# Altium PCB PCB.PcbDoc
Units mm, origin at the board's own origin, x right, y up, seen from the top; angles counter-clockwise.
Board outline 105 x 135 mm, 3 copper layers (Top Layer, Mid-Layer 9, Bottom Layer); 197 components, 98 nets, 576 pads, 14 vias.
Unrouted connection lines stored in the file: 420.
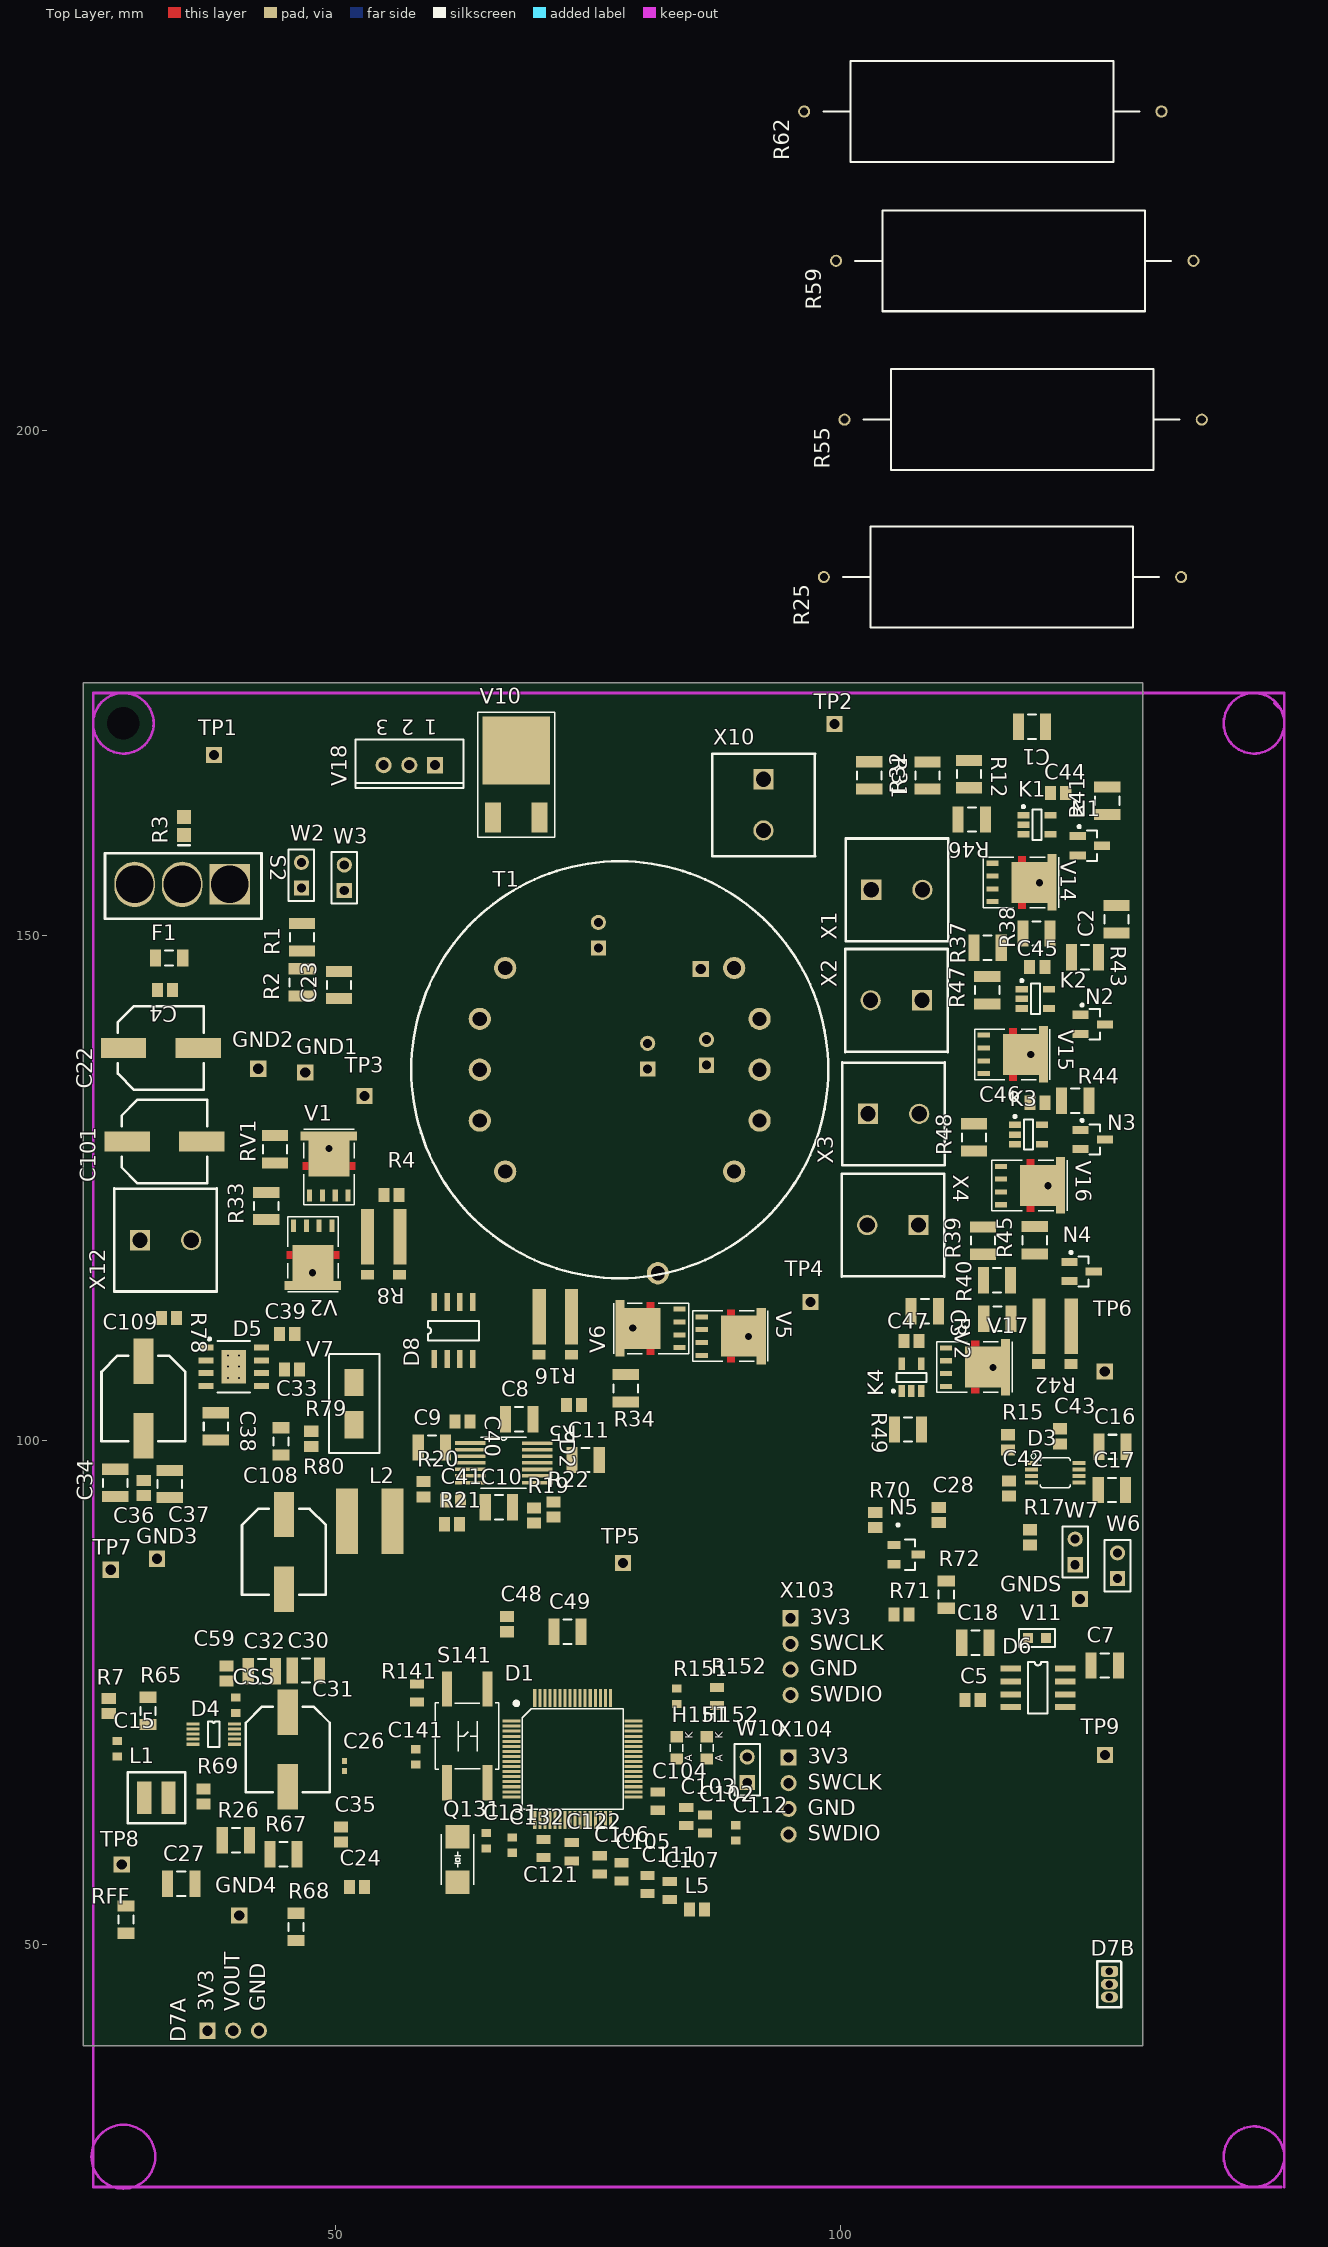
[diagram p0: Top Layer view]
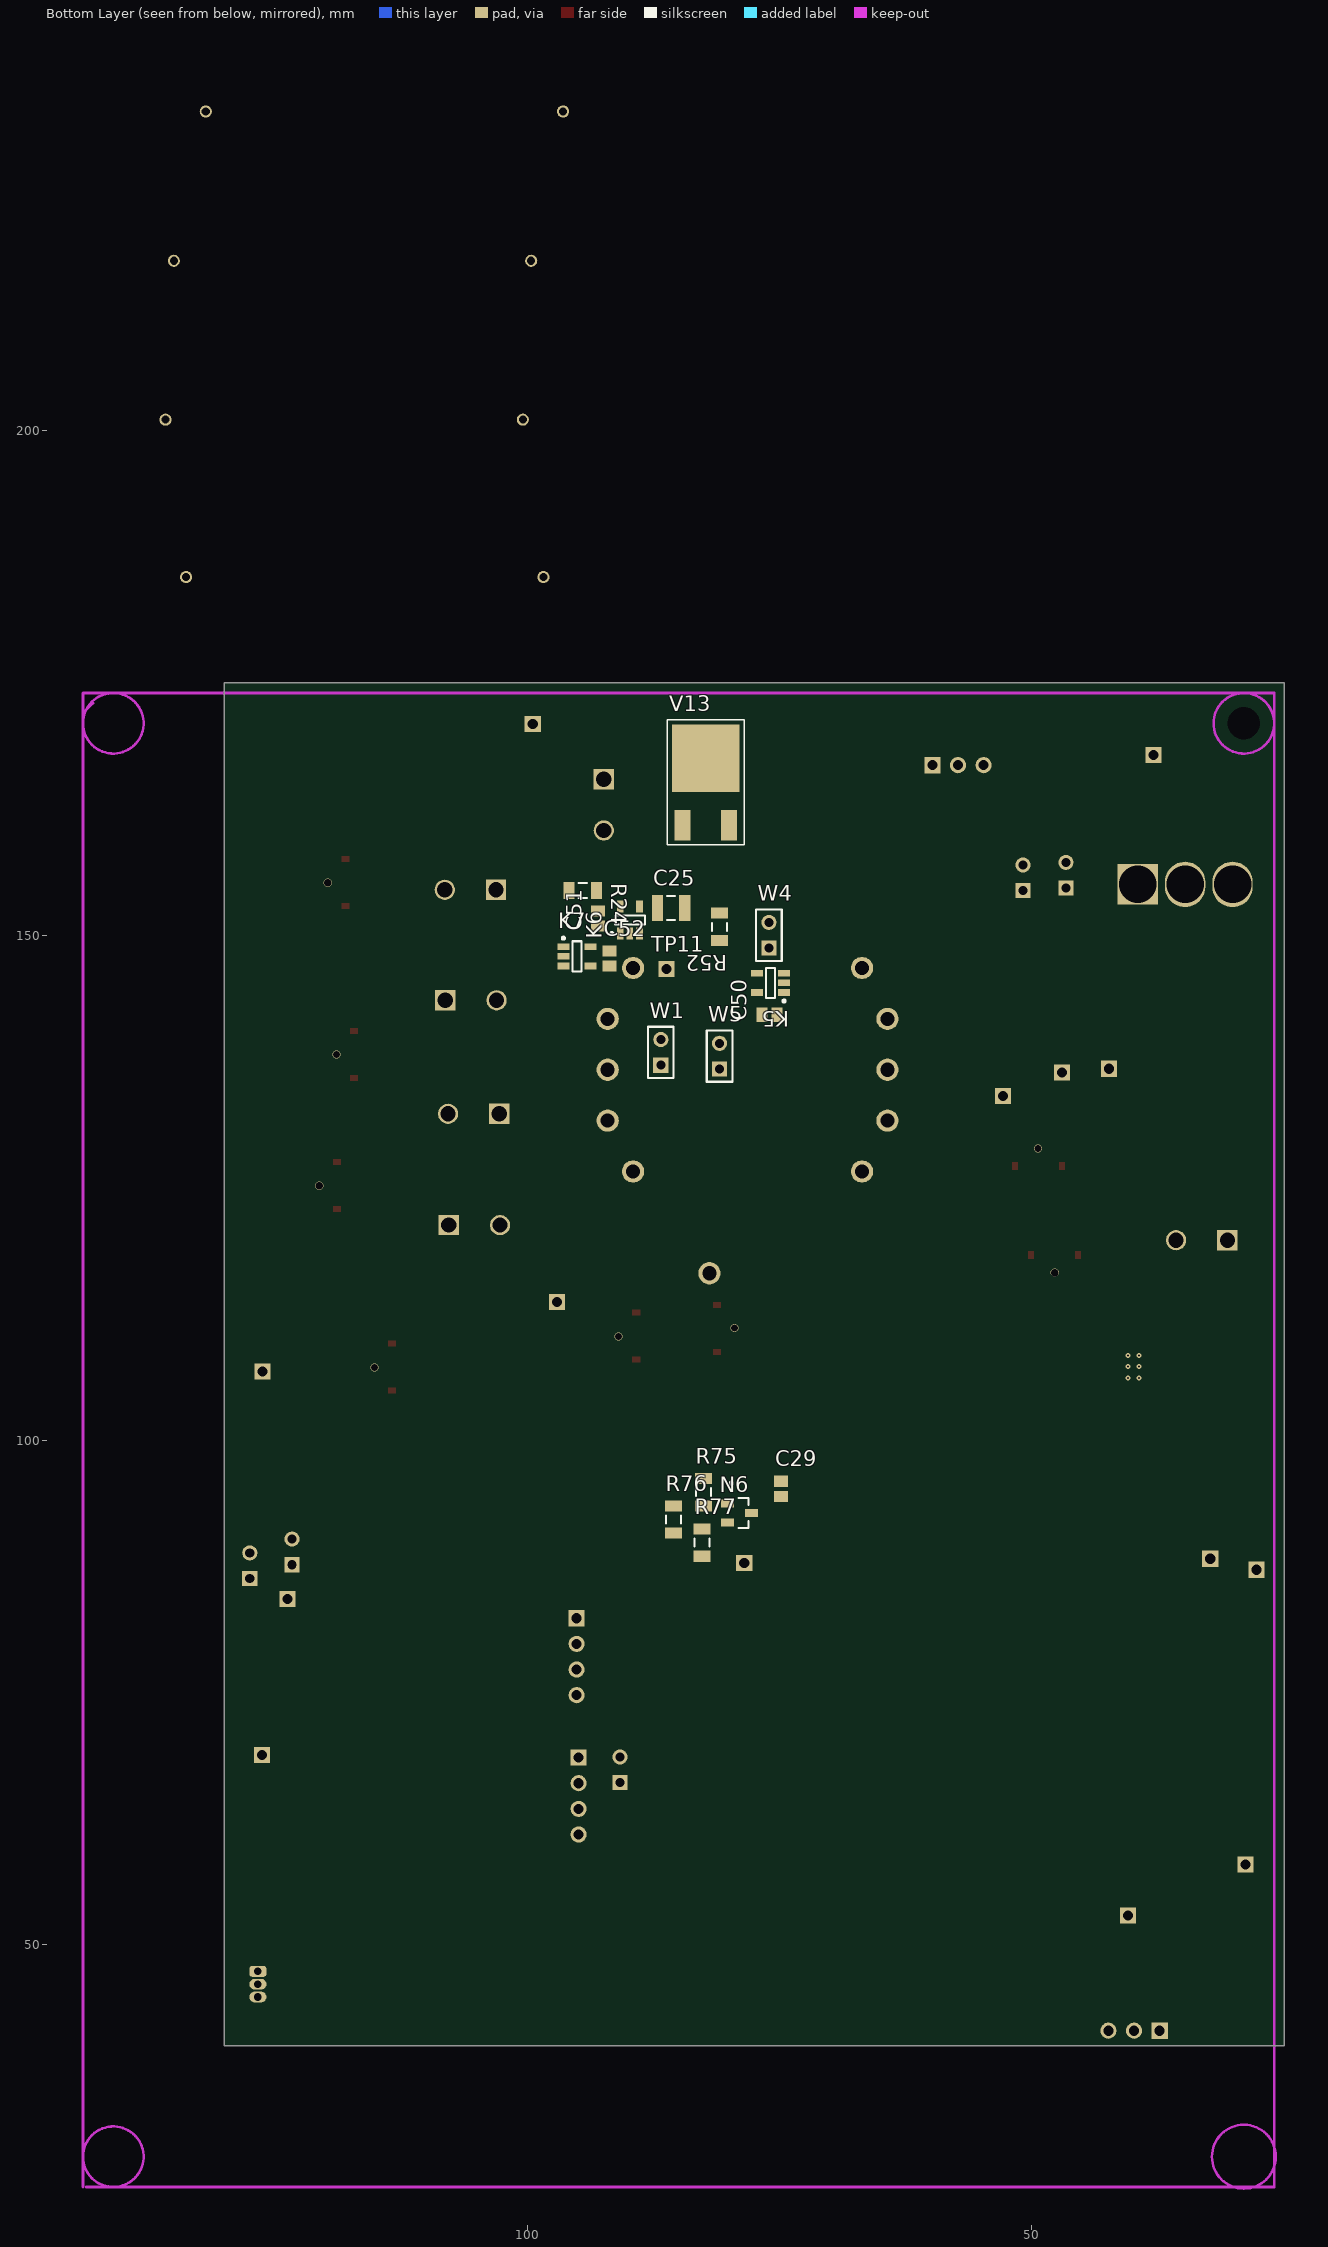
[diagram p1: Bottom Layer view, seen from below]
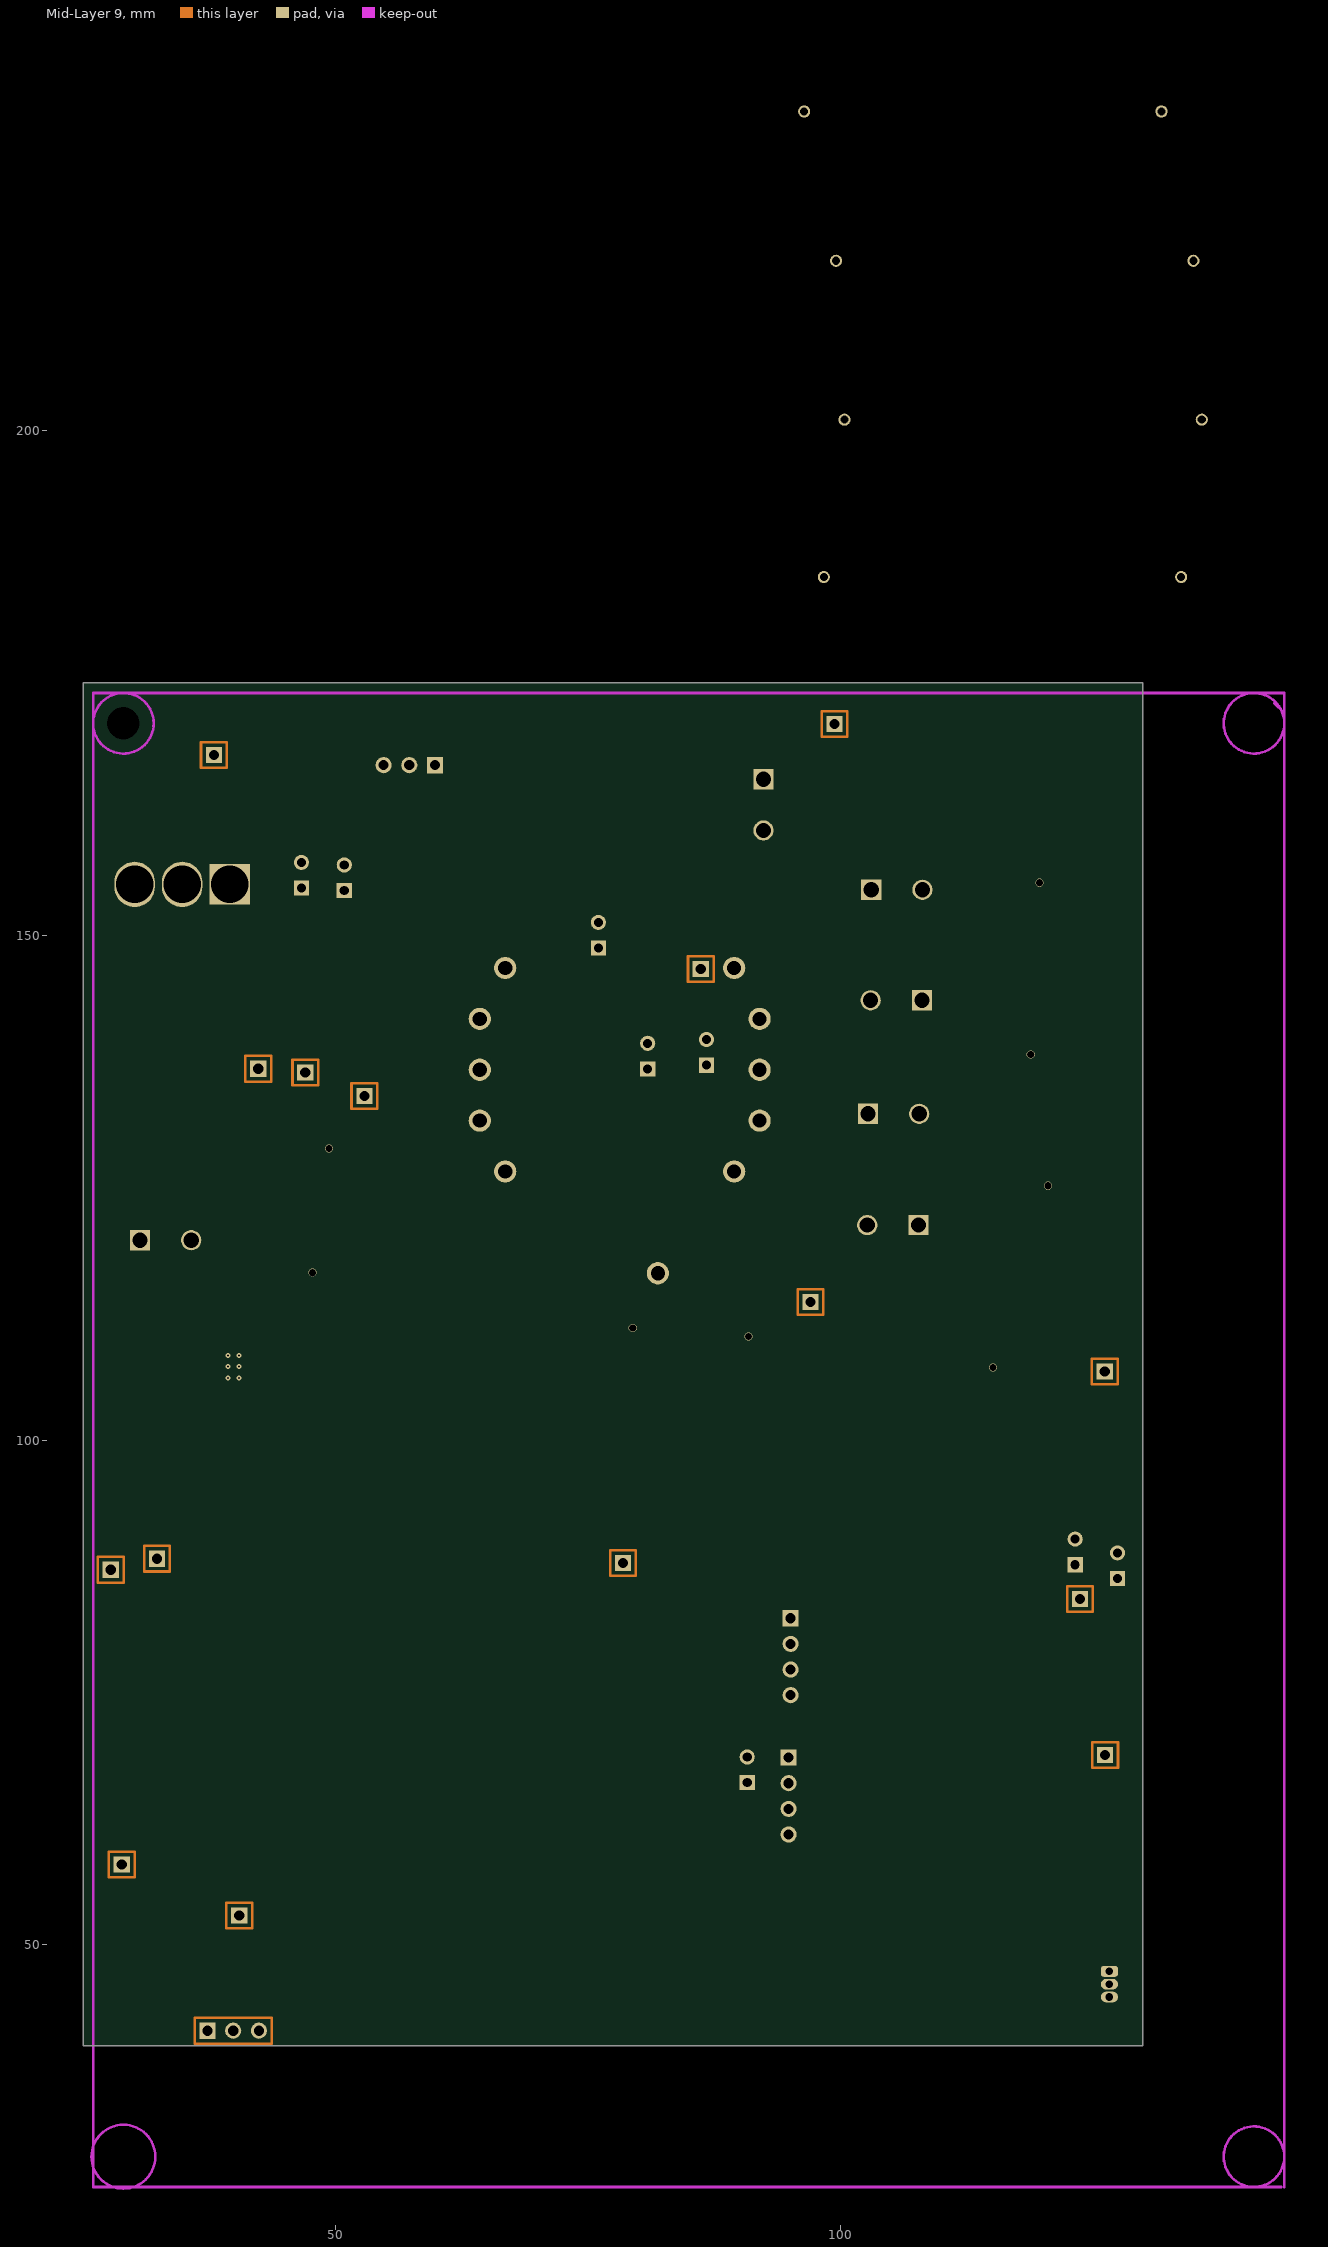
[diagram p2: Mid-Layer 9]

## Layer stack, top to bottom
Top Solder: solder mask 0.0102, Solder Resist, Dk 3.5
Top Layer: signal copper 0.0356
Dielectric 1: dielectric 0.32, FR-4, Dk 4.8
Mid-Layer 9: signal copper 0.0356
Dielectric2: dielectric 0.32, FR-4, Dk 4.8
Bottom Layer: signal copper 0.0356
Bottom Solder: solder mask 0.0102, Solder Resist, Dk 3.5

## Board outline
25,40 130,40 130,175 25,175

## Design rules (kind name [scope] priority, off if disabled: settings)
Clearance [All] p1: gap=0.127 ignorepadtopadclearanceinfootprint=FALSE
ComponentClearance [InComponent('No Component') vs InComponent('No Component')] p1: gap=0 collisioncheckmode=3 verticalgap=0 showdistances=FALSE
MinimumSolderMaskSliver [All] p1: minsoldermaskwidth=0
PolygonConnect [All] p1: connectstyle=Relief reliefconductorwidth=0.254 reliefentries=4 polygonreliefangle="90 Angle" airgapwidth=0.254
RoutingVias [All] p1: holewidth=0.711 width=1.27 viastyle="Through Hole" minholewidth=0.711 minwidth=1.27 maxholewidth=0.711 maxwidth=1.27
SilkToSilkClearance [All] p1: silktosilkclearance=0
SilkToSolderMaskClearance [IsPad] p1: minsilkscreentomaskgap=0 clearancetoexposedcopper=TRUE
SolderMaskExpansion [All] p1: expansion=0.102
Width [All] p1: maxlimit=5.08 minlimit=0.254 preferedwidth=0.254 midlayer9_maxwidth=0.254 minimp=50.000000 maximp=50.000000 favimp=50.000000
26 further rules are at their usual default settings.

## Classes and differential pairs
component class CPU_PCB: C102 C103 C104 C105 C106 C107 C111 C112 C121 C122 C131 C132 C141 D1 H151 H152 L5 Q131 R141 R151 R152 S141 W10 X103 X104
component class Integrirane_komponente: C5 C7 C8 C9 C10 C11 C15 C16 C17 C18 C24 C26 C27 C28 C29 C30 C31 C32 C33 C34 C35 C36 C37 C38 C39 C40 C41 C42 C43 C59 C108 C109 CSS D2 D3 D4 D5 D6 D7A D7B GND3 GND4 L1 L2 N5 N6 R7 R15 R17 R19 R20 R21 R22 R26 R65 R67 R68 R69 R70 R71 R72 R75 R76 R77 R78 R79 R80 RFF TP5 TP6 TP7 TP8 TP9 V7 V11 W6 W7

## Components (designator, comment, footprint, x,y, rotation, side; value= is the part's Value field where it differs from the comment)
C1 "0.1uF" C1210_L 119.01,170.65 r180 top value=100nF
C2 "0.1uF" C1210_L 127.37,151.584 r90 top value=100nF
C3 "0.1uF" C1210_L 115.58,112.01 r180 top value=100nF
C4 "4.7uF" C0805 33.11,144.58 r180 top
C5 "100n" C0805 113.13,74.23 r0 top value=100nF
C7 "10 uF" C1210_L 126.22,77.67 r0 top
C8 "0.1uF" C1210_L 68.21,102.06 r0 top value=100nF
C9 "0.1uF" C1210_L 59.556,99.25 r0 top value=100nF
C10 "0.1uF" C1210_L 66.2,93.33 r0 top value=100nF
C11 "0.1uF" C1210_L 74.79,98.02 r0 top value=100nF
C15 "0.01uF" CAP_0603 28.38,69.405 r90 top
C16 "0.1uF" C1210_L 126.99,99.32 r0 top value=100nF
C17 "0.1uF" C1210_L 126.92,95.04 r0 top value=100nF
C18 "10 uF" C1210_L 113.4,79.91 r0 top
C22 "47uF" SMD_CAP_RAD_8X10.2 32.71,138.839 r90 top
C23 "0.1uF" C1210_L 50.37,145.08 r90 top value=100nF
C24 "560pF" C0805 52.14,55.71 r180 top
C25 "10uF" C1210_L 85.741,152.7 r180 bottom
C26 "33pF" 0402 50.92,67.69 r90 top
C27 "2.2uF" C1210_L 34.73,56.04 r0 top value=100pF
C28 "100nF" C0805 109.773,92.57 r90 top
C29 "100nF" C0805 74.84,95.16 r90 bottom
C30 "10uF" C1210_L 47.074,77.17 r0 top value="10 uF"
C31 "47uF" SMD_CAP_RAD_8X10.2 45.291,69.34 r0 top
C32 "2.2uF" C1210_L 42.72,77.096 r0 top value=100pF
C33 "100nF" C0805 45.7,106.99 r0 top
C34 "10uF" C1210_L 28.19,95.75 r90 top
C35 "22uF" C0805 50.54,60.92 r90 top
C36 "100nF" C0805 31.02,95.25 r90 top
C37 "0.47uF" C1210_L 33.6,95.636 r90 top
C38 "0.47uF" C1210_L 38.16,101.35 r90 top
C39 "4.7uF" C0805 45.226,110.5 r0 top
C40 "100nF" C0805 62.6,101.82 r0 top
C41 "100n" C0805 61.66,94.02 r0 top value=100nF
C42 "100nF" C0805 116.72,95.2 r90 top
C43 "100nF" C0805 121.8,100.366 r90 top
C44 "100n" C0805 121.61,164.094 r180 top value=100nF
C45 "100n" C0805 119.53,146.854 r0 top value=100nF
C46 "100n" C0805 119.546,133.414 r0 top value=100nF
C47 "100n" C0805 107.07,109.79 r180 top value=100nF
C48 "100n" C0805 67,81.75 r90 top value=100nF
C49 "10uF" C1210_L 73,81 r0 top value="10 uF"
C50 "100n" C0805 76,142.126 r0 bottom value=100nF
C51 "100n" C0805 92.974,151.664 r90 bottom value=100nF
C52 "100n" C0805 91.831,147.691 r90 bottom value=100nF
C59 "100n" C0805 39.21,76.88 r90 top value=100nF
C101 "470 uF" SMD_CAP_RAD_8X10.2 33.069,129.571 r90 top
C102 "100nF" CAP_0805 86.617,61.95 r90 top
C103 "100nF" CAP_0805 84.76,62.7 r90 top
C104 "100nF" CAP_0805 81.93,64.22 r90 top
C105 "100nF" CAP_0805 78.33,57.22 r90 top
C106 "100nF" CAP_0805 76.19,57.91 r90 top
C107 "4.7uF" CAP_0805 83.12,55.38 r90 top
C108 "47uF" SMD_CAP_RAD_8X10.2 44.9,88.92 r0 top
C109 "47uF" SMD_CAP_RAD_8X10.2 30.98,104.106 r0 top
C111 "1uF" CAP_0805 80.92,55.96 r90 top
C112 "0.01uF" CAP_0603 89.68,61.07 r90 top
C121 "2.2uF" CAP_0805 70.62,59.54 r90 top
C122 "2.2uF" CAP_0805 73.42,59.21 r90 top
C131 "16pF" CAP_0603 64.96,60.305 r90 top
C132 "16pF" CAP_0603 67.53,59.875 r90 top
C141 "0.01uF" CAP_0603 57.96,68.6 r90 top
CSS "0.01uF" CAP_0603 40.13,73.731 r90 top
D1 "STM32F415RG" LQFP64 73.5,68.4 r0 top
D2 "INA2331" "F za pojacalo(2)" 64.385,95.2 r0 top
D3 "INA331" "F za pojaèalo (1)" 121.32,96.88 r0 top
D4 "LTC3530EMS#PBF" MSOP10 35.89,71.86 r0 top
D5 "APE1911-HF-3" ESOP8_12.5V 39.92,107.26 r0 top
D6 "TL7660" invertor 116.9,77.35 r0 top
D7A "TEMP_SENZOR_BAT" temp_senzor 39.86,41.53 r90 top
D7B "TEMP_SENZOR_OK" temp_senzor_datasheet 52.86,-120.28 r270 top
D8 "driver_mosfet" SOIC8 57.895,105.16 r90 top
F1 "Fuse 1" C1206 33.53,147.74 r0 top
GND1 "" TEST_POINT 47.02,136.4 r90 top
GND2 "" TEST_POINT 42.36,136.78 r90 top
GND3 "" TEST_POINT 32.33,88.24 r90 top
GND4 "" TEST_POINT 40.48,52.88 r90 top
GNDS "" TEST_POINT 123.76,84.24 r90 top
H151 "GREEN" "LED 1.25X2 SMD" 83.8,68.4 r90 top value=Green
H152 "RED" "LED 1.25X2 SMD" 86.8,68.4 r90 top value=Red
K1 "TLC3704QJ" SOT-23 119.51,160.94 r0 top
K2 "TLC3704QJ" SOT-23 119.35,143.7 r0 top
K3 "TLC3704QJ" SOT-23 118.67,130.26 r0 top
K4 "TLC3704QJ" SOT-23 107.07,106.2 r90 top
K5 "NCS2200" SOT-23 75.9,145.28 r0 bottom
K6 "TLC3704QJ" SOT-23 89.82,151.52 r90 bottom
K7 "TLC3704QJ" SOT-23 95.06,147.91 r180 bottom
L1 "3.3uH" inductor_3.3uH 32.27,64.56 r0 top
L2 "22uH" inductor_22uH 53.4,91.94 r0 top
L5 "Inductor" C0805 85.83,53.5 r0 top
N1 "LM4040" SOT-23-ref_chip 126.84,156.97 r0 top value=2.5V
N2 "LM4040" SOT-23-ref_chip 127.13,139.28 r0 top value=2.5V
N3 "LM4040" SOT-23-ref_chip 127.13,127.86 r0 top value=2.5V
N4 "LM4040" SOT-23-ref_chip 126.03,114.79 r0 top value=2.5V
N5 "" SOT23_N5_N6 106.743,88.64 r0 top value=1.65V
N6 "Voltage Reference" SOT23_N5_N6 78.77,92.77 r180 bottom value=9.9V
Q131 "XTAL" QUARTZ_SMD_16MHZ 62.11,58.44 r90 top value=16MHz
R1 "10K" C1210_L 46.7,149.81 r90 top
R2 "20K" C1210_L 46.66,145.34 r90 top
R3 "0.5" C2512 35.01,160.82 r90 top
R4 "10" C0805 55.55,124.28 r180 top
R5 "10" C0805 73.65,103.45 r180 top
R7 "100K" C0805 27.55,73.64 r270 top
R8 "5m" "otpornik R8, R16" 55.39,120.34 r180 top
R12 "10K" C1210_L 112.77,165.97 r270 top
R15 "100K" C0805 116.65,99.77 r90 top
R16 "5m" "otpornik R8, R16" 72.4,112.413 r180 top
R17 "100K" C0805 118.81,90.36 r90 top
R19 "100K" C0805 69.66,92.52 r90 top
R20 "100K" C0805 58.72,95.12 r90 top
R21 "100K" C0805 61.55,91.66 r0 top
R22 "100K" C0805 71.614,93.11 r90 top
R24 "4k7" C1206 94.49,154.43 r180 bottom
R25 "1" "F za 7W otpornik" 132.79,185.49 r180 top
R26 "1M" C1210_L 40.14,60.35 r0 top
R31 "20K" C1210_L 102.89,165.84 r270 top
R32 "10K" C1210_L 108.67,165.83 r90 top value=10k
R33 "510k" C1210_L 43.159,123.18 r90 top value="510 k"
R34 "510k" C1210_L 78.77,105.12 r270 top value="510 k"
R37 "20K" C1210_L 114.62,148.76 r180 top
R38 "10K" C1210_L 119.46,150.189 r180 top
R39 "10K" C1210_L 114.16,119.75 r90 top
R40 "10K" C1210_L 115.54,115.82 r180 top
R41 "1K" C1210_L 126.457,163.324 r90 top
R42 "5m" "otpornik R8, R16" 121.9,111.49 r180 top
R43 "1K" C1210_L 124.256,147.83 r180 top
R44 "1K" C1210_L 123.3,133.614 r180 top
R45 "1K" C1210_L 119.28,119.79 r90 top
R46 "2k2" C1210_L 113.05,161.46 r180 top
R47 "2k2" C1210_L 114.57,144.56 r90 top
R48 "2k2" C1210_L 113.276,129.98 r90 top
R49 "2k2" C1210_L 106.73,101.03 r0 top
R52 "4k7" C1206 80.93,150.84 r270 bottom
R55 "1" "F za 7W otpornik" 134.83,201.08 r180 top
R59 "1" "F za 7W otpornik" 134,216.82 r180 top
R62 "1" "F za 7W otpornik" 130.84,231.61 r180 top
R65 "33.2K" C1206 31.44,73.17 r90 top
R67 "1M" C1210_L 44.86,58.97 r0 top
R68 "576K" C1206 46.1,51.77 r90 top
R69 "10K" C0805 36.92,64.69 r90 top
R70 "1.65K" C0805 103.487,92.07 r90 top
R71 "1.33K" C0805 106.073,82.71 r0 top
R72 "1K" C1206 110.513,84.68 r90 top
R75 "14K" C1206 82.54,94.83 r90 bottom
R76 "2K" C1206 85.51,92.13 r90 bottom
R77 "2K" C1206 82.67,89.83 r90 bottom
R78 "100K" C0805 33.51,112.08 r0 top
R79 "11.5K" C0805 47.61,100.12 r90 top
R80 "1K" C1206 44.62,99.86 r90 top
R141 "100R" RES_0805 58.1,74.94 r90 top
R151 "1K" RES_0603 83.8,74.6 r90 top
R152 "4K99" RES_0805 87.8,74.6 r90 top
RFF "15K" C1206 29.27,52.49 r270 top
RV1 "Res Varistor" C1210_L 44.03,128.8 r90 top value="Varistor (90V)"
RV2 "Res Varistor" C1210_L 108.394,112.76 r180 top value=MLV
S2 "SW-SPDT" toggle_switch 34.68,155.12 r270 top
S141 "SW-PB" "SWITCH KSEK43GLFS" 61.056,66.03 r90 top
T1 "transformator" "F za transformator" 78.167,135.42 r0 top
TP1 "" TEST_POINT 37.96,167.87 r90 top
TP2 "" TEST_POINT 99.45,170.93 r90 top
TP3 "" TEST_POINT 52.87,134.08 r90 top
TP4 "" TEST_POINT 97.06,113.667 r90 top
TP5 "" TEST_POINT 78.49,87.81 r90 top
TP6 "" TEST_POINT 126.22,106.79 r90 top
TP7 "" TEST_POINT 27.75,87.15 r90 top
TP8 "" TEST_POINT 28.84,57.94 r90 top
TP9 "" TEST_POINT 126.26,68.8 r90 top
TP11 "" TEST_POINT 86.2,146.66 r90 bottom
V1 "NMOS-2" "SO-8L single_f" 47.448,124.224 r0 top
V2 "NMOS-2" "SO-8L single_f" 49.665,121.226 r180 top
V5 "NMOS-2" "SO-8L single_f" 86.291,112.195 r270 top
V6 "NMOS-2" "SO-8L single_f" 84.11,109.15 r90 top
V7 "B340A-13-F" DO-214AC 51.85,103.6 r90 top
V10 "MOSFET-N" TO-252-3 67.968,167.926 r0 top
V11 "Diode" "Diode -small signal" 119.6,80.39 r0 top
V13 "MOSFET-N" TO-252-3 82.27,167.17 r180 bottom
V14 "NMOS-2" "SO-8L single_f" 115.104,157.135 r270 top
V15 "NMOS-2" "SO-8L single_f" 114.234,140.105 r270 top
V16 "NMOS-2" "SO-8L single_f" 115.944,127.115 r270 top
V17 "NMOS-2" "SO-8L single_f" 110.49,109.12 r270 top
V18 "Schottky Diode" TO-220-AB 57.32,166.85 r180 top
W1 "Jumper" HDR1X2 86.76,137.13 r90 bottom
W2 "Jumper 4.3A" HDR1X2 46.63,154.68 r90 top
W3 "Jumper 4.3A" HDR1X2 50.88,154.43 r90 top
W4 "Jumper" HDR1X2 76.05,148.74 r90 bottom
W5 "Jumper" HDR1X2 80.94,136.76 r90 bottom
W6 "Jumper" HDR1X2 127.48,86.28 r90 top
W7 "Jumper" HDR1X2 123.29,87.64 r90 top
W10 "Jumper" HDR1X2 90.8,66.06 r90 top
X1 "Header 2" "F Header 1x2" 103.08,154.509 r90 top
X2 "Header 2" "F Header 1x2" 108.11,143.56 r270 top
X3 "Header 2" "F Header 1x2" 102.76,132.313 r90 top
X4 "Header 2" "F Header 1x2" 107.77,121.29 r270 top
X10 "Header 2" "F Header 1x2" 92.41,165.462 r0 top
X12 "Header 2" "F Header 1x2" 30.639,119.793 r90 top
X103 "Header 4" HEADER-4_PIN 95.1,82.34 r0 top
X104 "Header 4" HEADER-4_PIN 94.9,68.54 r0 top

## Footprints (in the part's own frame and the unit in brackets; to place one, negate y for a bottom-side part, rotate by r counter-clockwise, add the part's x,y. Pads: shape width x height; smd on the part's side, far side on the other; paste and mask are expansions set on the pad)
0402 [mm] "Chip Capacitor, Body 1.0x0.5mm, IPC High Density"
  rect 0.6x0.5 smd: 1(-0.5,0) 2(0.5,0)
  body extent -0.55,-0.3 0.55,0.3, height 1.3
C0805 [mm] "Chip Capacitor, Body 2.0x1.3mm, IPC High Density"
  rect 1.1x1.4 smd: 1(-0.75,0) 2(0.75,0)
  body extent -1.1,-0.72 1.1,0.72, height 1.4
C1206 [mm] "Chip Capacitor, Body 3.2x1.6mm, IPC High Density"
  rect 1.1x1.7 smd: 1(-1.35,0) 2(1.35,0)
  silkscreen extent -0.4,-0.75 0.4,0.75, body extent -1.7,-0.9 1.7,0.9, height 1.3
C1210_L [mm] "Chip Capacitor, Body 3.2x2.5mm, IPC High Density"
  rect 1.1x2.6 smd: 1(-1.35,0) 2(1.35,0)
  silkscreen extent -0.4,-1.2 0.4,1.2, body extent -1.7,-1.35 1.7,1.35, height 1.5
C2512 [mm] "Chip Capacitor, Body 2.54x1.27mm, IPC High Density"
  rect 1.4x1.4 smd: 1(-0.9,0) 2(0.9,0)
  silkscreen extent -1.9,-0.6 -1.9,0.6, body extent -1.45,-0.82 1.45,0.82, height 1.3
CAP_0603 [mm]
  rect 0.8x0.95 smd: 1(-0.765,0) 2(0.765,0)
  body extent -0.8,-0.4 0.8,0.4, height 0.5
CAP_0805 [mm] "Chip Capacitor; Body 2.0 x 1.2 mm (LxW typ)"
  rect 0.9x1.4 smd: 1(-0.9,0) 2(0.9,0)
  body extent -1,-0.62 1,0.63, height 0.78
"Diode -small signal" [mm]
  rect 1x1 smd: 1(-1,0) 2(0.8,0)
  silkscreen extent -1.9,-0.9 1.7,0.9
DO-214AC [mm]
  rect 2.7x1.9 smd: 1(-2.1,0) 2(2.1,0)
  silkscreen extent -4.9,-2.5 4.9,2.5
ESOP8_12.5V [mm] "TSOP, 8-Leads, Body 4,90x3,90mm, Pitch 1,27mm, Thermal Pad 3,35x2,45mm, IPC Medium Density"
  rect 1.5x0.6 smd: 1(-2.75,1.9) 2(-2.75,0.635) 3(-2.75,-0.635) 4(-2.75,-1.905) 5(2.75,-1.905) 6(2.75,-0.635) 7(2.75,0.635) 8(2.75,1.905)
  rect 2.45x3.35 smd: 9(0,0)
  silkscreen extent -2.52,-2.55 1.6,2.88, body extent -2,-2.55 2,2.55, height 1.5
"F Header 1x2" [mm]
  rect 2x2 hole 1.5: 1(0,0)
  round 2 hole 1.5: 2(0,-5.08)
  silkscreen extent -5.08,-7.62 5.12,2.54
"F za 7W otpornik" [mm]
  round 1.2 hole 0.8: 1(-1,0) 2(34.4,0)
  silkscreen extent 1.2,-5 32.5,5
"F za pojacalo(2)" [mm]
  rect 3x0.356 smd paste-25.4 mask-25.4: 1(-1.025,4.5) 2(-1.025,3.825) 3(-1.025,3.2) 4(-1.025,2.55) 5(-1.025,1.9) 6(-1.025,1.25) 7(-1.025,0.575) 8(5.6,0.575) 9(5.6,1.25) 10(5.6,1.875) 11(5.6,2.55) 12(5.6,3.2) 13(5.6,3.825) 14(5.605,4.496)
  silkscreen extent 0.03,0 4.55,5.08
"F za pojaèalo (1)" [mm]
  rect 1.3x0.4 smd paste-25.4 mask-25.4: 1(-2.35,0.85) 2(-2.35,0.2) 3(-2.35,-0.45) 4(-2.35,-1.1) 5(2.35,-1.1) 6(2.35,-0.45) 7(2.35,0.2) 8(2.35,0.85)
  silkscreen extent -2.41,-1.63 1.5,1.78
"F za transformator" [mm]
  round 2.2 hole 1.4: 1(-11.34,-8.82) 2(-13.86,-3.78) 3(-13.86,1.26) 4(-13.86,6.3) 5(-11.34,11.34) 6(11.34,11.34) 7(13.86,6.3) 8(13.86,1.26) 9(13.86,-3.78) 10(11.34,-8.82) 11(3.78,-18.9)
  silkscreen extent -20.64,-19.39 20.66,21.91
HDR1X2 [mm] "Connector; Header; 2 Position"
  rect 1.5x1.5 hole 0.9: 1(0,0)
  round 1.5 hole 0.9: 2(2.54,0)
  silkscreen extent -1.27,-1.27 3.81,1.27
HEADER-4_PIN [mm] "HARWIN M20-9993646"
  rect 1.6x1.6 hole 1: 1(0,0)
  round 1.6 hole 1: 2(0,-2.54) 3(0,-5.08) 4(0,-7.62)
  body extent -1.3,-8.88 1.24,1.28, height 8.65
inductor_3.3uH [mm]
  rect 1.4x3.2 smd: 1(-1.2,0) 2(1.2,0)
  silkscreen extent -2.84,-2.54 2.84,2.54
inductor_22uH [mm]
  rect 2.2x6.5 smd: 1(-2.25,0) 2(2.25,0)
invertor [mm]
  rect 2x0.6 smd: 1(0,0) 2(0,-1.27) 3(0,-2.54) 4(0,-3.81) 5(5.4,-3.81) 6(5.4,-2.54) 7(5.4,-1.27) 8(5.4,0)
  silkscreen extent 1.73,-4.44 3.67,0.64
"LED 1.25X2 SMD" [mm] "LED 1.25mmx2mm SMD red, green"
  rect 1.1x1.25 smd: 1(0,0) 2(2.2,0)
  silkscreen extent 0.72,-0.63 1.48,0.63, body extent 0.13,-0.62 2.13,0.63, height 1.11
LQFP64 [mm] "Microprocessor, STM32F415RG"
  rect 1.8x0.3 smd mask+0.051: 1(-6.05,3.75) 2(-6.05,3.25) 3(-6.05,2.75) 4(-6.05,2.25) 5(-6.05,1.75) 6(-6.05,1.25) 7(-6.05,0.75) 8(-6.05,0.25) 9(-6.05,-0.25) 10(-6.05,-0.75) 11(-6.05,-1.25) 12(-6.05,-1.75) 13(-6.05,-2.25) 14(-6.05,-2.75) 15(-6.05,-3.25) 16(-6.05,-3.75) 33(6.05,-3.75) 34(6.05,-3.25) 35(6.05,-2.75) 36(6.05,-2.25) 37(6.05,-1.75) 38(6.05,-1.25) 39(6.05,-0.75) 40(6.05,-0.25) 41(6.05,0.25) 42(6.05,0.75) 43(6.05,1.25) 44(6.05,1.75) 45(6.05,2.25) 46(6.05,2.75) 47(6.05,3.25) 48(6.05,3.75)
  rect 0.3x1.8 smd mask+0.051: 17(-3.75,-6.05) 18(-3.25,-6.05) 19(-2.75,-6.05) 20(-2.25,-6.05) 21(-1.75,-6.05) 22(-1.25,-6.05) 23(-0.75,-6.05) 24(-0.25,-6.05) 25(0.25,-6.05) 26(0.75,-6.05) 27(1.25,-6.05) 28(1.75,-6.05) 29(2.25,-6.05) 30(2.75,-6.05) 31(3.25,-6.05) 32(3.75,-6.05) 49(3.75,6.05) 50(3.25,6.05) 51(2.75,6.05) 52(2.25,6.05) 53(1.75,6.05) 54(1.25,6.05) 55(0.75,6.05) 56(0.25,6.05) 57(-0.25,6.05) 58(-0.75,6.05) 59(-1.25,6.05) 60(-1.75,6.05) 61(-2.25,6.05) 62(-2.75,6.05) 63(-3.25,6.05) 64(-3.75,6.05)
  silkscreen extent -5.75,-5 5,5.69, body extent -6,-6 6,6, height 1.6
MSOP10 [mm]
  rect 1.3x0.3 smd: 1(0,0) 2(0,-0.5) 3(0,-1) 4(0,-1.5) 5(0,-2) 6(4.118,-2) 7(4.118,-1.5) 8(4.118,-1) 9(4.118,-0.5) 10(4.118,0)
  silkscreen extent 1.48,-2.25 2.63,0.25
"otpornik R8, R16" [mm]
  rect 1.3x0.98 smd: 0(-0.974,3.966) 0(2.226,3.966)
  rect 1.3x5.5 smd: 1(-1,0.2) 2(2.2,0.2)
QUARTZ_SMD_16MHZ [mm] "Crystal, 16MHz, ABM3 Series, 18pF, 50ppm, 20ppm"
  rect 2.3x2.4 smd: 1(-2.25,0) 2(2.25,0)
  silkscreen extent -2.5,-1.6 2.5,1.6, body extent -2.5,-1.6 2.5,1.6, height 1.3
RES_0603 [mm]
  rect 0.8x0.95 smd: 1(-0.765,0) 2(0.765,0)
  body extent -0.8,-0.41 0.8,0.41, height 0.45
RES_0805 [mm]
  rect 0.9x1.4 smd: 1(-0.9,0) 2(0.9,0)
  body extent -1,-0.62 1,0.63, height 0.6
SMD_CAP_RAD_8X10.2 [mm] "SMD radial capacitor F pack"
  rect 2x4.5 smd: 1(0,3.7) 2(0,-3.7)
  silkscreen extent -4.15,-4.25 4.15,4.25, body extent -4.15,-4.95 4.15,4.95, height 10.2
"SO-8L single_f" [mm]
  rect 0.5x1.2 smd: 1(3.81,0) 3(0,0) 3(1.27,0) 3(2.54,0)
  rect 5.6x0.9 smd: 2(1.9,5.9)
  rect 4.061x3.63 smd: 2(1.905,3.706)
  Top Layer region: -0.721,2.501 -0.126,2.501 -0.126,3.311 -0.721,3.311
  Top Layer region: 3.935,2.501 4.53,2.501 4.53,3.311 3.935,3.311
  silkscreen extent -0.6,-0.9 4.4,6.55
SOIC8 [mm]
  rect 1.8x0.55 smd: 1(2.85,-1.905) 2(2.85,-3.175) 3(2.85,-4.445) 4(2.85,-5.715) 5(8.5,-5.715) 6(8.5,-4.445) 7(8.5,-3.175) 8(8.5,-1.905)
  silkscreen extent 4.71,-6.35 6.64,-1.27
SOT23_N5_N6 [mm] "SOT23, 3-Leads, Body 2,90x2,90mm, Pitch 2,00mm, IPC Medium Density"
  rect 1.3x0.8 smd: 1(-1.4,0.95) 2(-1.4,-0.95) 3(1,0)
  silkscreen extent -1.12,-1.5 0.7,3.07
SOT-23 [mm] "SOT23, 5-Leads, Body 2,90x2,80mm, Pitch 0,95mm, IPC Medium Density"
  rect 1.2x0.65 smd: 1(-1.35,0.95) 3(-1.35,0) 6(1.35,-0.95) 7(-1.35,-0.95) 12(1.35,0.95)
  silkscreen extent -1.47,-1.5 0.45,1.92, body extent -0.85,-1.5 0.85,1.5, height 1.45
SOT-23-ref_chip [mm] "SOT23, 3-Leads, Body 2,92x2,80mm, Pitch 0,95mm, IPC Medium Density"
  rect 1.6x0.8 smd: 1(-3.3,2.85) 2(-3.3,0.95) 3(-0.9,1.9)
  silkscreen extent -3.27,0.4 -1.4,3.92, body extent -2.8,0.38 -1.4,3.42, height 1.45
"SWITCH KSEK43GLFS" [mm] "Push button, tactile switch, KSEK43G LFS, SMD"
  rect 3.5x1 smd: 1(0,0) 1(9.3,0) 2(0,-4) 2(9.3,-4)
  silkscreen extent 1.38,-5.13 7.93,1.15, body extent -0.3,-5.15 9.6,1.15, height 4.29
temp_senzor [mm]
  rect 1.6x1.6 hole 1: 1(-0.049,2.521)
  round 1.6 hole 1: 2(-0.049,-0.019) 3(-0.049,-2.559)
  Mid-Layer 9 lines w0.254: -1.319,3.791 1.221,3.791 1.221,-3.829 -1.319,-3.829 -1.319,3.791
temp_senzor_datasheet [mm]
  rrect50% 1.07x1.7 hole 0.75: 1(-167.64,73.82)
  oval 1.07x1.7 hole 0.75: 2(-166.37,73.82) 3(-165.1,73.82)
  silkscreen extent -168.65,72.6 -164.1,75
TEST_POINT [mm]
  rect 1.6x1.6 hole 1: 1(0,0)
  Mid-Layer 9 lines w0.254: -1.27,1.27 -1.27,-1.27 1.27,-1.27 1.27,1.27 -1.27,1.27
TO-220-AB [mm] "TO, Thru-Hole, Vertical, Heatsink Mounted; 3 In-Line Leads; Pitch 2.54 mm"
  rect 1.6x1.6 hole 1: 1(-2.54,0)
  round 1.6 hole 1: 2(0,0) 3(2.54,0)
  silkscreen extent -5.35,-2.55 5.35,2.25
TO-252-3 [mm]
  rect 1.6x3 smd paste-25.4 mask-25.4: 1(-2.348,-6.266) 2(2.252,-6.266)
  rect 6.7x6.7 smd paste-25.4 mask-25.4: 3(-0.048,0.384)
  silkscreen extent -3.85,-8.22 3.75,4.18
toggle_switch [mm]
  rect 4x4 hole 3.708: 1(0.08,4.84)
  oval 4.5x4 hole 3.708: 2(0.08,0.14) 3(0.08,-4.56)
  silkscreen extent -3,-7.5 3.5,8

## Part data
C1 C2 C3 C4 C5 C7 C8 C9 C10 C11 C15 C16 C17 C18 C23 C24 C25 C26 C27 C28 C29 C30 C32 C33 C34 C35 C36 C37 C38 C39 C40 C41 C42 C43 C44 C45 C46 C47 C48 C49 C50 C51 C52 C59 C102 C103 C104 C105 C106 C107 C111 C112 C121 C122 C131 C132 C141 CSS: library part Cap, "Capacitor", dobavljaè=Farnell
  C1 C2 C3 C8 C9 C10 C11 C16 C17 C23: cijena (funte)=0.241, kataloški broj=1828960, opis komponente=Capacitor
  C4 C107: cijena (funte)=0.61, kataloški broj=2346932, opis komponente="Capacitor 4.7uF ceramic"
  C5 C28 C29 C33 C36 C40 C41 C42 C43 C44 C45 C46 C47 C48 C50 C51 C52 C59: cijena (funte)=0.141, kataloški broj=1856515, opis komponente="Capacitor 100nF"
  C7 C18: cijena (funte)=0.275, kataloški broj=2320934, opis komponente="Ceramic Capacitor"
  C15 CSS: cijena (funte)=0.0529, kataloški broj=1709948, opis komponente="Capacitor 0.01uF"
  C24: cijena (funte)=0.127, kataloški broj=2332776, opis komponente="Capacitor 560pF"
  C25 C34: cijena (funte)=-, kataloški broj=2320931, opis komponente="Capacitor 100nF"
  C26: cijena (funte)=0.0496, kataloški broj=2821128, opis komponente="Capacitor 33pF"
  C27: cijena (funte)=0.539, kataloški broj=2688549, opis komponente="ceramic capacitor"
  C30 C49: cijena (funte)=-, kataloški broj=2320931, opis komponente=Capacitor
  C32: cijena (funte)=0.539, kataloški broj=2688549, opis komponente="Ceramic Capacitor"
  C35: cijena (funte)=0.31, kataloški broj=2672185, opis komponente="Ceramic Capacitor"
  C37 C38: cijena (funte)=0.302, kataloški broj=2320942, opis komponente="Capacitor 0.47uF"
  C39: cijena (funte)=0.61, kataloški broj=2346932, opis komponente="Capacitor 4.7uF"
  C102 C103 C104 C105 C106: cijena (funte)=0.182, kataloški broj=1856515, opis komponente="Capacitor 100nF ceramic"
  C111: cijena (funte)=0.0507, kataloški broj=2496946, opis komponente="Capacitor 1uF ceramic"
  C112 C141: cijena (funte)=0.0529, kataloški broj=1709948, opis komponente="Capacitor 0.01uF ceramic"
  C121 C122: cijena (funte)=0.186, kataloški broj=1845751, opis komponente="Capacitor 2.2uF ceramic"
  C131 C132: cijena (funte)=0.239, kataloški broj=1885400, opis komponente="Capacitor 16pF"
C22 C31 C101 C108 C109: library part elko, dobavljaè=Farnell
  C22 C31 C108 C109: cijena (funte)=0.619, kataloški broj=9696032, opis komponente="Electrolytic Capacitor"
  C101: cijena (funte)=0.794, kataloški broj=1539457, opis komponente="Electrolytic Capacitor 470 µF"
D1: "Processor", cijena (funte)=7.87, dobavljaè=Farnell, kataloški broj=2064370, opis komponente=STM32F415RG
D2: library part pojaèalo(2), cijena (funte)=2.95, dobavljaè=Farnell, kataloški broj=2496201, opis komponente=pojaèalo
D3: library part "pojaèalo (1)", cijena (funte)=2.63, dobavljaè=Farnell, kataloški broj=1459472, opis komponente=INA331
D6: library part invertor, cijena (funte)=1.32, dobavljaè=Farnell, kataloški broj=1755282, opis komponente=invertor
D7A D7B: library part "Header 3", "Header, 3-Pin", cijena (funte)=0.516, dobavljaè=Farnell, kataloški broj=2432144, opis komponente=temp_senzor
F1: "Fuse", cijena (funte)=0.228, dobavljaè=Farnell, kataloški broj=2834845, opis komponente="osiguraè 8A"
GND1 GND2 GND3 GND4 GNDS TP1 TP2 TP3 TP4 TP5 TP6 TP7 TP8 TP9 TP11: library part testpoint
H151 H152: library part LED0, "Typical INFRARED GaAs LED", dobavljaè=Farnell
  H151: cijena (funte)=0.0613, kataloški broj=2463991, opis komponente="LED diode GREEN"
  H152: cijena (funte)=0.259, kataloški broj=2610416, opis komponente="LED diode red"
K1 K2 K3 K4 K5 K6 K7: library part LP2901D, "Low Power Quad Differential Comparator", cijena (funte)=0.239, dobavljaè=Farnell, kataloški broj=2510412, opis komponente="Analogue Comparator"
L1 L2: library part Inductor, "Inductor", dobavljaè=Farnell
  L1: cijena (funte)=0.295, kataloški broj=2808289, opis komponente="zavojnica 3.3uH"
  L2: cijena (funte)=0.412, kataloški broj=2061654, opis komponente="Inductor 22uH"
N1 N2 N3 N4: library part "referentni chip", cijena (funte)=0.567, dobavljaè=Farnell, kataloški broj=9778322, opis komponente="chip za ref napon"
N5 N6: library part voltage_ref, cijena (funte)=0.299, dobavljaè=Farnell, kataloški broj=1904053
  N5: opis komponente="Voltage Reference 1.65V"
  N6: opis komponente="Voltage Reference 9.9V"
Q131: "Crystal Oscillator", cijena (funte)=0.535, dobavljaè=Farnell, kataloški broj=1611806, opis komponente=oscilator
R1 R2 R3 R4 R5 R7 R8 R12 R15 R16 R17 R19 R20 R21 R22 R24 R25 R26 R31 R32 R33 R34 R37 R38 R39 R40 R41 R42 R43 R44 R45 R46 R47 R48 R49 R52 R55 R59 R62 R65 R67 R68 R69 R70 R71 R72 R75 R76 R77 R78 R79 R80 R141 R151 R152 RFF: library part Res2, "Resistor"
  R1 R12 R32 R38 R39 R40: cijena (funte)=0.304, dobavljaè=Farnell, kataloški broj=2502771, opis komponente="Resistor 10K"
  R2 R31 R37: cijena (funte)=0.249, dobavljaè=Farnell, kataloški broj=2380713, opis komponente="Resistor 20K"
  R3: cijena (funte)=0.60, dobavljaè=Farnell, kataloški broj=1100070, opis komponente=Resistor
  R4 R5: cijena (funte)=0.0786, dobavljaè=Farnell, kataloški broj=2380457, opis komponente="resitor 10 ohm"
  R7 R15 R17 R19 R20 R21 R22 R78: cijena (funte)=0.006, dobavljaè=Farnell, kataloški broj=2447551, opis komponente="Resistor 100K"
  R8 R16 R42: cijena (funte)=2.49, dobavljaè=Farnell, kataloški broj=2363991, opis komponente=Resistor
  R24 R52: cijena (funte)=0.0274, dobavljaè=Farnell, kataloški broj=1100209, opis komponente=resistor
  R25 R55 R59 R62: cijena (funte)=0.426, dobavljaè=Farnell, kataloški broj=1292518, opis komponente="Through Hole Resistor 7W"
  R26: cijena (funte)=0.206, dobavljaè=Farnell, kataloški broj=1153399, opis komponente="Resistor 1M"
  R33 R34: cijena (funte)=0.26, dobavljaè=Farnell, kataloški broj=1894354, opis komponente=resistor
  R41 R43 R44 R45: cijena (funte)=0.0952, dobavljaè=Farnell, kataloški broj=2324006, opis komponente=resistor
  R46 R47 R48 R49: cijena (funte)=0.0949, dobavljaè=Farnell, kataloški broj=2324037, opis komponente=resistor
  R65: cijena (funte)=0.0253, dobavljaè=Farnell, kataloški broj=1632568, opis komponente="resistor 33.2K"
  R67: cijena (funte)=0.206, dobavljaè=FArnell, kataloški broj=1153399, opis komponente="Resistor 1M"
  R68: cijena (funte)=0.0292, dobavljaè=Farnell, kataloški broj=2307780, opis komponente=otpornik
  R69: cijena (funte)=0.237, dobavljaè=Farnell, kataloški broj=1577673, opis komponente="Resistor 10K"
  R70: cijena (funte)=0.48, dobavljaè=Farnell, kataloški broj=1160148, opis komponente="Resistor 1.65K"
  R71: cijena (funte)=0.48, dobavljaè=Farnell, kataloški broj=1160148, opis komponente="Resistor 1.33K 0.1%"
  R72: cijena (funte)=1.08, dobavljaè=Farnell, kataloški broj=1858213, opis komponente="Resistor 1K 0.1%"
  R75: cijena (funte)=0.60, dobavljaè=Farnell, kataloški broj=1501725, opis komponente="Resistor 14K 0.1%"
  R76: cijena (funte)=0.929, dobavljaè=Farnell, kataloški broj=1858216, opis komponente="Resistor 2K 0.1%"
  R77: cijena (funte)=0.929, dobavljaè=Farnell, kataloški broj=1858216, opis komponente="Resistor 2K"
  R79: cijena (funte)=0.27, dobavljaè=Farnell, kataloški broj=9369856, opis komponente="Resistor 11.5K 0.1%"
  R80: cijena (funte)=1.08, dobavljaè=Farnell, kataloški broj=1858213, opis komponente="Resistor 1K  0.1%"
  R141: cijena (funte)=0.01, dobavljaè=Farnell, kataloški broj=9333703, opis komponente="Resistor 100R"
  R151: cijena (funte)=0.0444, dobavljaè=Farnell, kataloški broj=1469740, opis komponente="Resistor 1K, 1%"
  R152: cijena (funte)=0.56, dobavljaè=Farnell, kataloški broj=2094815, opis komponente="Resistor 4K99, 0.1%"
  RFF: cijena (funte)=0.023, dobavljaè=Farnell, kataloški broj=2079009, opis komponente="Resistor 15K"
RV1 RV2: "Varistor (Voltage-Sensitive Resistor)", cijena (funte)=0.40, dobavljaè=Farnell, kataloški broj=2717744, opis komponente="Varistor (90V)"
S2: "SPDT Subminiature Toggle Switch, Right Angle Mounting, Vertical Actuation", cijena (funte)=2, dobavljaè=Farnell, kataloški broj=2292959, opis komponente="sklopka 5A"
S141: "Switch", cijena (funte)=0.159, dobavljaè=Farnell, kataloški broj=2435308
V1 V2 V5 V6 V14 V15 V16 V17: "N-Channel Power MOSFET", dobavljaè=Farnell, opis komponente=N-MOSFET
V7 V11: library part "Diode 1N4148", "High Conductance Fast Diode", dobavljaè=Farnell
  V7: cijena (funte)=0.23, kataloški broj=2306401, opis komponente="Dioda (3A, 40V)"
  V11: cijena (funte)=0.237, kataloški broj=1773531, opis komponente=dioda
V10 V13: library part NMOS-2, "N-Channel Power MOSFET", cijena (funte)=0.585, dobavljaè=Farnell, kataloški broj=1794799, opis komponente=N-MOSFET
V18: library part "D Schottky", cijena (funte)=0.26, dobavljaè=Farnell, kataloški broj=2675118, opis komponente="Schottky Diode"
W1 W4 W5 W6 W7 W10: "Jumper Wire", cijena (funte)=0.0874, dobavljaè=Farnell, kataloški broj=2396303, opis komponente=jumper
W2 W3: library part Jumper, "Jumper Wire", cijena (funte)=0.149, dobavljaè=Farnell, kataloški broj=2505007, opis komponente="jumper 4.3A"
X1 X2 X3 X4 X10 X12: "Header, 2-Pin", cijena (funte)=0.239, dobavljaè=Farnell, kataloški broj=2396251, opis komponente="Header, 2-Pin"
X103 X104: "Header, 4-Pin", dobavljaè=Farnell, kataloški broj=1022264, opis komponente=konektor
D4: cijena (funte)=4.41, dobavljaè=Farnell, kataloški broj=1329368, opis komponente=LTC3530EMS#PBF
D5: cijena (funte)=0.371, dobavljaè=Farnell, kataloški broj=2319645, opis komponente="Boost(Step Up) Regulator 12.5V"
D8: cijena (funte)=1.43, dobavljaè=Farnell, kataloški broj=2782690, opis komponente=driver_mosfet
L5: cijena (funte)=0.0859, dobavljaè=Farnell, kataloški broj=2329422, opis komponente="ferrite bead"

## Free pads (board coordinates)
  round 1.524 hole 3.2: 1(29,29) 6(141,29) 7(141,171) 8(29,171)

## Via types
v1: diameter 0.8, hole 0.711, Top Layer to Bottom Layer, 8 vias
v2: diameter 0.5, hole 0.2, Top Layer to Bottom Layer, 6 vias

## Nets (pads, with @x,y where several pads share a name; then routed paths per layer and width w, separated by ;. In a path a pad name is that pad's centre, name@x,y a point inside that pad or via, vN(x,y) a via of type N, cw(c..) or ccw(c..) an arc to the next point about the centre after c; other vN are vias at no path point)
1.65V: C5.2 C28.1 D2.10 D2.12 D3.5 D6.8 K7.6 R15.2 R19.2 R21.2 R71.2 TP6.1 W7.2
3.3V: C26.2 C27.1 C35.1 C40.2 C42.2 C102.2 C103.2 C104.2 C105.2 C106.2 C107.2 C111.2 D1.1 D1.19 D1.32 D1.48 D1.64 D2.8 D2.11 D2.14 D3.7 D3.8 D4.6 D7A.1 D7B.1 L5.1 R67.2 R70.1 R151.2 TP8.1 W10.1 W10.2 X103.1 X104.1
9.9V: C29.1 K6.6 R75.2 TP5.1
12.5V: C25.2 C33.2 C39.2 C44.2 C48.2 C49.2 C50.2 C51.2 C52.2 C108.1 D8.6 K1.12 K5.12 K6.12 K7.12 R24.2 R41.2 R46.1 R52.2 R77.2 R79.2 TP7.1 V7.2
A+: C10.2 D2.3 R8.2 V2.2
  other v1: 47.735,116.576
A-: C4.1 C11.2 C22.2 C23.1 C25.1 C48.1 C49.1 C50.1 C52.1 C101.2 D2.2 D8.3 GND1.1 GND2.1 K5.3 R2.1 R8.1 RV1.1 X12.2
B+: C9.2 D2.5 R16.2 V6.2
  other v1: 79.46,111.08
B-: C1.1 C2.1 C3.1 C8.2 C17.2 C44.1 C45.1 C46.1 C47.1 C51.1 D2.6 D3.3 GNDS.1 K4.3 K6.3 K7.3 N4.2 R12.1 R16.1 R38.1 R40.1 R42.2 RV2.2 T1.11 V13.2 V17.3 X4.2
BAT+: C4.2 C22.1 C30.2 C31.1 C32.1 C34.2 C36.2 C37.2 C59.2 C101.1 C109.1 D4.7 D5.2 F1.1 K5.7 L2.1 R26.1 R78.1 X12.1
C-: C16.2 D3.2 R42.1
ENA: D1.43 D8.1
ENB: D1.44 D8.8
GND: C5.1 C8.1 C9.1 C10.1 C11.1 C15.1 C16.1 C17.1 C18.1 C27.2 C28.2 C29.2 C30.1 C31.2 C32.2 C34.1 C35.2 C36.1 C37.1 C38.1 C40.1 C41.1 C42.1 C43.1 C59.1 C102.1 C103.1 C104.1 C105.1 C106.1 C107.1 C109.2 C111.1 C112.1 C121.1 C122.1 C131.2 C132.2 C141.1 CSS.1 D1.12 D1.18 D1.60 D1.63 D4.5 D5.8 D6.3 D6.6 D7A.3 D7B.3 GND3.1 GND4.1 H151.2 H152.2 N5.3 N6.3 R7.1 R65.1 R68.2 R72.1 R76.1 R80.1 S141.2 V11.2 X103.3 X104.4
NetC7_1: C7.1 D6.4
NetC7_2: C7.2 D6.2
NetC15_2: C15.2 D4.2 R7.2
NetC24_1: C24.1 D4.9 R67.1 R68.1 RFF.2
NetC24_2: C24.2 R69.1
NetC26_1: C26.1 RFF.1
NetC33_1: C33.1 C39.1 C108.2 D5.7
NetC38_2: C38.2 D5.4
NetC112_2: C112.2 D1.13 L5.2
NetC121_2: C121.2 D1.31
NetC122_2: C122.2 D1.47
NetC131_1: C131.1 D1.5 Q131.1
NetC132_1: C132.1 D1.6 Q131.2
NetC141_2: C141.2 R141.2 S141.1
NetCSS_2: CSS.2 D4.8 R26.2
NetD2_1: D2.1 R19.1 R20.2
NetD2_7: D2.7 R21.1 R22.2
NetD3_1: D3.1 R15.1 R17.2 W6.2 W7.1
NetD4_1: D4.1 R65.2
NetD4_3: D4.3 L1.2
NetD4_4: D4.4 L1.1
NetD4_10: D4.10 R69.2
NetD5_1: D5.1 R78.2
NetD5_3: D5.3 R79.1 R80.2
NetD5_5: D5.5 D5.6
NetD8_5: D8.5 R5.2
NetD8_7: D8.7 R4.1
NetF1_2: F1.2 S2.2
NetH151_1: H151.1 R151.1
NetH152_1: H152.1 R152.1
NetK1_1: K1.1 R46.2 V14.1
NetK1_6: K1.6 N1.1 R41.1
NetK2_1: K2.1 R47.1 V15.1
NetK2_6: K2.6 N2.1 R43.1
NetK3_1: K3.1 R48.1 V16.1
NetK3_6: K3.6 N3.1 R44.1
NetK4_1: K4.1 R49.1 V17.1
NetK4_6: K4.6 N4.1 R45.1
NetK5_1: K5.1 R52.1 W4.1
NetK6_1: K6.1 W1.2
NetK7_1: K7.1 W5.1
NetL2_2: L2.2 V7.1
NetN5_1: N5.1 R71.1 R72.2
NetN5_2: N5.2 R70.2
NetN6_1: N6.1 R75.1 R76.2
NetN6_2: N6.2 R77.1
NetR1_2: R1.2 R3.1 S2.1 TP1.1 W2.1 W3.1
NetR3_2: R3.2 T1.5 V10.2 V18.2 W2.2 W3.2
NetR4_2: R4.2 R33.1 V1.1 V2.1
NetR5_1: R5.1 R34.2 V5.1 V6.1
NetR24_1: R24.1 V13.1 W1.1 W5.2
NetR25_1: R25.1 V14.2
  other v1: 119.754,155.205
NetR31_1: R31.1 R32.2
NetR33_2: R33.2 V1.3 V2.3
NetR34_1: R34.1 V5.3 V6.3
NetR55_1: R55.1 V15.2
  other v1: 118.884,138.175
NetR59_1: R59.1 V16.2
  other v1: 120.594,125.185
NetR62_1: R62.1 V17.2
  other v1: 115.14,107.19
NetRV1_2: RV1.2 T1.1 TP3.1 V1.2
  other v1: 49.378,128.874
NetRV2_1: RV2.1 T1.10 TP4.1 V5.2
  other v1: 90.941,110.265
NetV10_1: V10.1 W4.2
NetV13_3: V13.3 X10.2
NRST: D1.7 R141.1
PC13_LED: D1.2 R152.2
PWM1A: D1.41 D8.2
PWM1B: D1.34 D8.4
PWM2: D1.37 K7.7 TP11.1
RX: D1.52 X104.2
SWCLK: D1.49 X103.2
SWDIO: D1.46 X103.4
TX: D1.51 X104.3
U_bat_temp: D1.22 D7A.2
U_ok_temp: D1.23 D7B.2
Ubat: C23.2 D1.15 R1.1 R2.2
UC1: C1.2 D1.8 R12.2 R32.1
UC2: C2.2 D1.9 R37.1 R38.2
UC3: C3.2 D1.10 R39.1 R40.2
UC4: D1.11 K3.3 K4.7 N3.2 R62.2 V16.3 X3.2 X4.1
Uout: D1.14 D3.6 R17.1 W6.1
UR8: D1.16 D2.13 R20.1
UR16: D1.17 D2.9 R22.1
US1: C45.2 K1.7 K2.12 K5.6 K6.7 R25.2 R31.2 R43.2 R47.2 T1.6 TP2.1 V10.3 V18.1 X1.1 X10.1
US2: C46.2 K1.3 K2.7 K3.12 N1.2 R37.2 R44.2 R48.2 R55.2 V14.3 X1.2 X2.1
US3: C47.2 K2.3 K3.7 K4.12 N2.2 R39.2 R45.2 R49.2 R59.2 V15.3 X2.2 X3.1
V-: C18.2 C41.2 C43.2 D2.4 D3.4 D6.5 TP9.1 V11.1
pads on no net: D1.3 D1.4 D1.20 D1.21 D1.24 D1.25 D1.26 D1.27 D1.28 D1.29 D1.30 D1.33 D1.35 D1.36 D1.38 D1.39 D1.40 D1.42 D1.45 D1.50 D1.53 D1.54 D1.55 D1.56 D1.57 D1.58 D1.59 D1.61 D1.62 D5.9 D6.1 D6.7 N1.3 N2.3 N3.3 N4.3 R8.0 R16.0 R42.0 S2.3 T1.2 T1.3 T1.4 T1.7 T1.8 T1.9 V18.3
copper on no net:
  other v2: 39.37,106.16 40.47,106.16 39.37,107.26 40.47,107.26 39.37,108.36 40.47,108.36

## Keep-outs
Keep-Out Layer:
  circle w0.254: c141,29 r3
  circle w0.254: c29,29 r3.162
  circle w0.254: c29,171 r3
  circle w0.254: c141,171 r3
  lines w0.254: 142,174 144,174 144,171.4 ; 143,173 144,172 144,26 ; 143.6,174 123,174 27,174 26,174 26,26 123,26 143.7,26

## Text inside footprints (layer, text, board x,y; h text height)
D7A: Top Overlay "VOUT" at 40.514,43.386 h1.52 r90; Top Overlay "3V3" at 37.974,43.386 h1.52 r90; Top Overlay "GND" at 43.054,43.386 h1.52 r90
H151: Top Overlay "A" at 85.375,68.125 h0.76 r90; Top Overlay "K" at 85.4,70.425 h0.76 r90
H152: Top Overlay "A" at 88.375,68.125 h0.76 r90; Top Overlay "K" at 88.4,70.425 h0.76 r90
V18: Top Overlay "3" at 55.28,171.375 h1.5 r180; Top Overlay "2" at 57.82,171.375 h1.5 r180; Top Overlay "1" at 60.11,171.375 h1.5 r180
X103: Top Overlay "SWDIO" at 97.005,74.085 h1.52; Top Overlay "GND" at 97.005,76.625 h1.52; Top Overlay "3V3" at 97.005,81.705 h1.52; Top Overlay "SWCLK" at 97.005,79.165 h1.52
X104: Top Overlay "SWDIO" at 96.805,60.285 h1.52; Top Overlay "GND" at 96.805,62.825 h1.52; Top Overlay "3V3" at 96.805,67.905 h1.52; Top Overlay "SWCLK" at 96.805,65.365 h1.52